# EAGLE board RCShield-v4 (EAGLE 6.3)
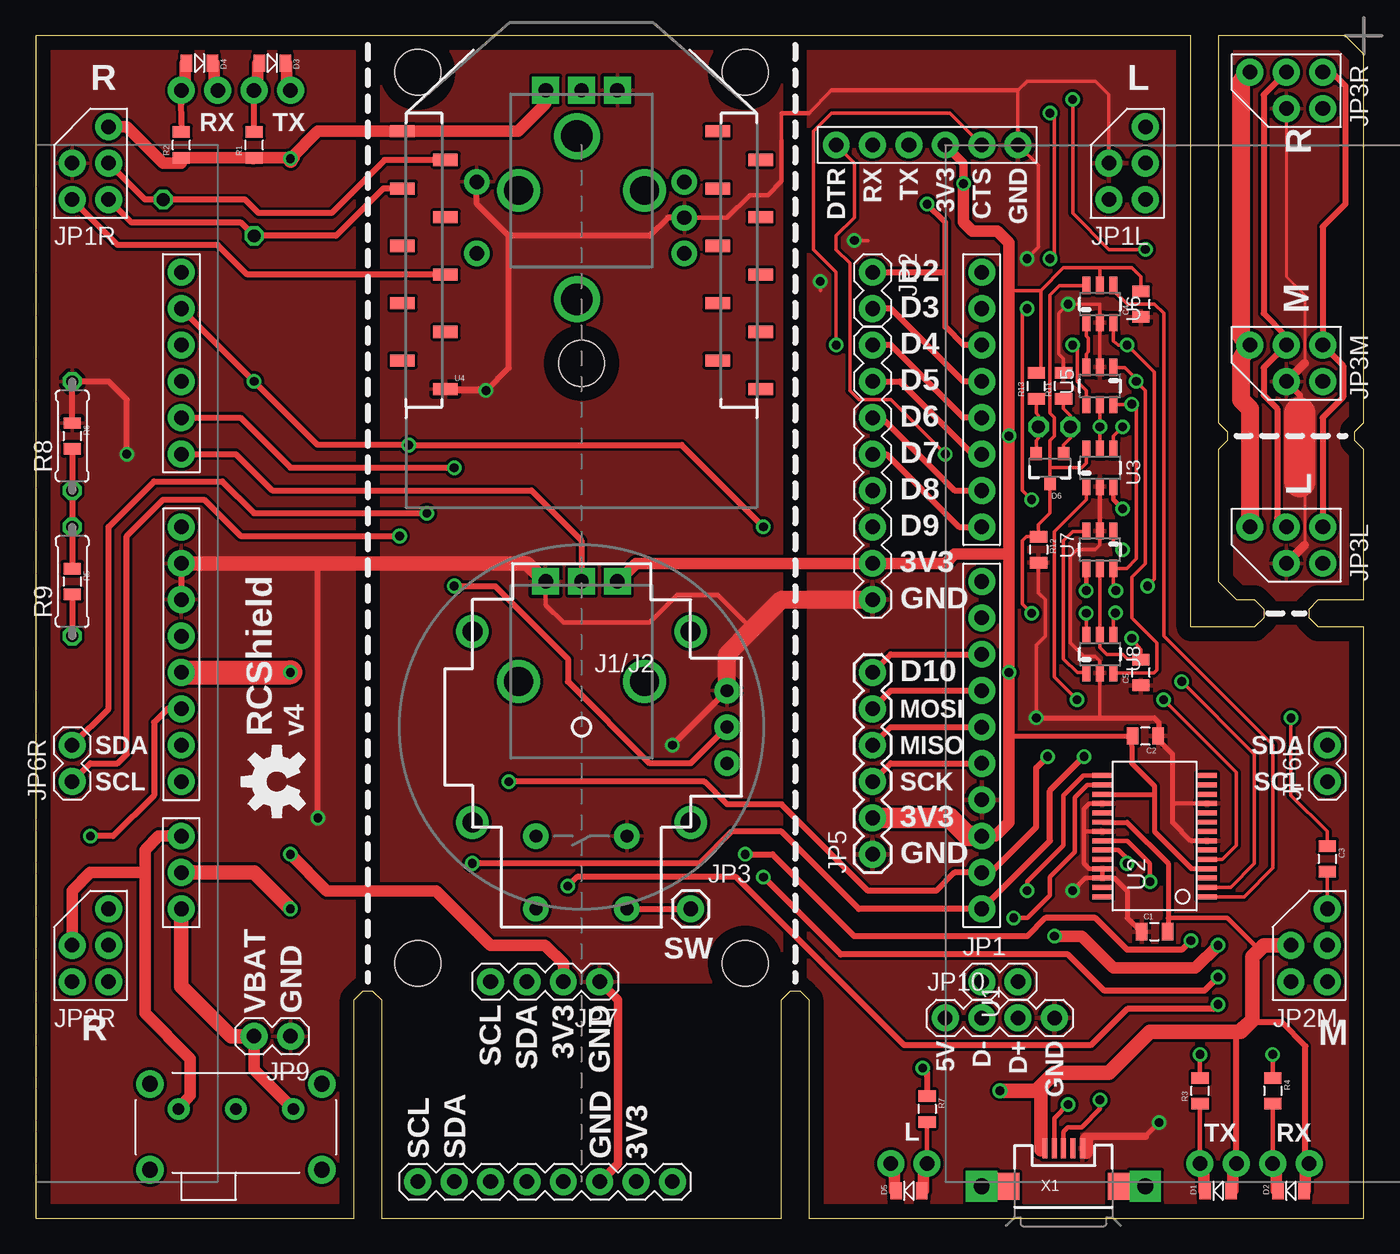
[diagram p0: board, top side]
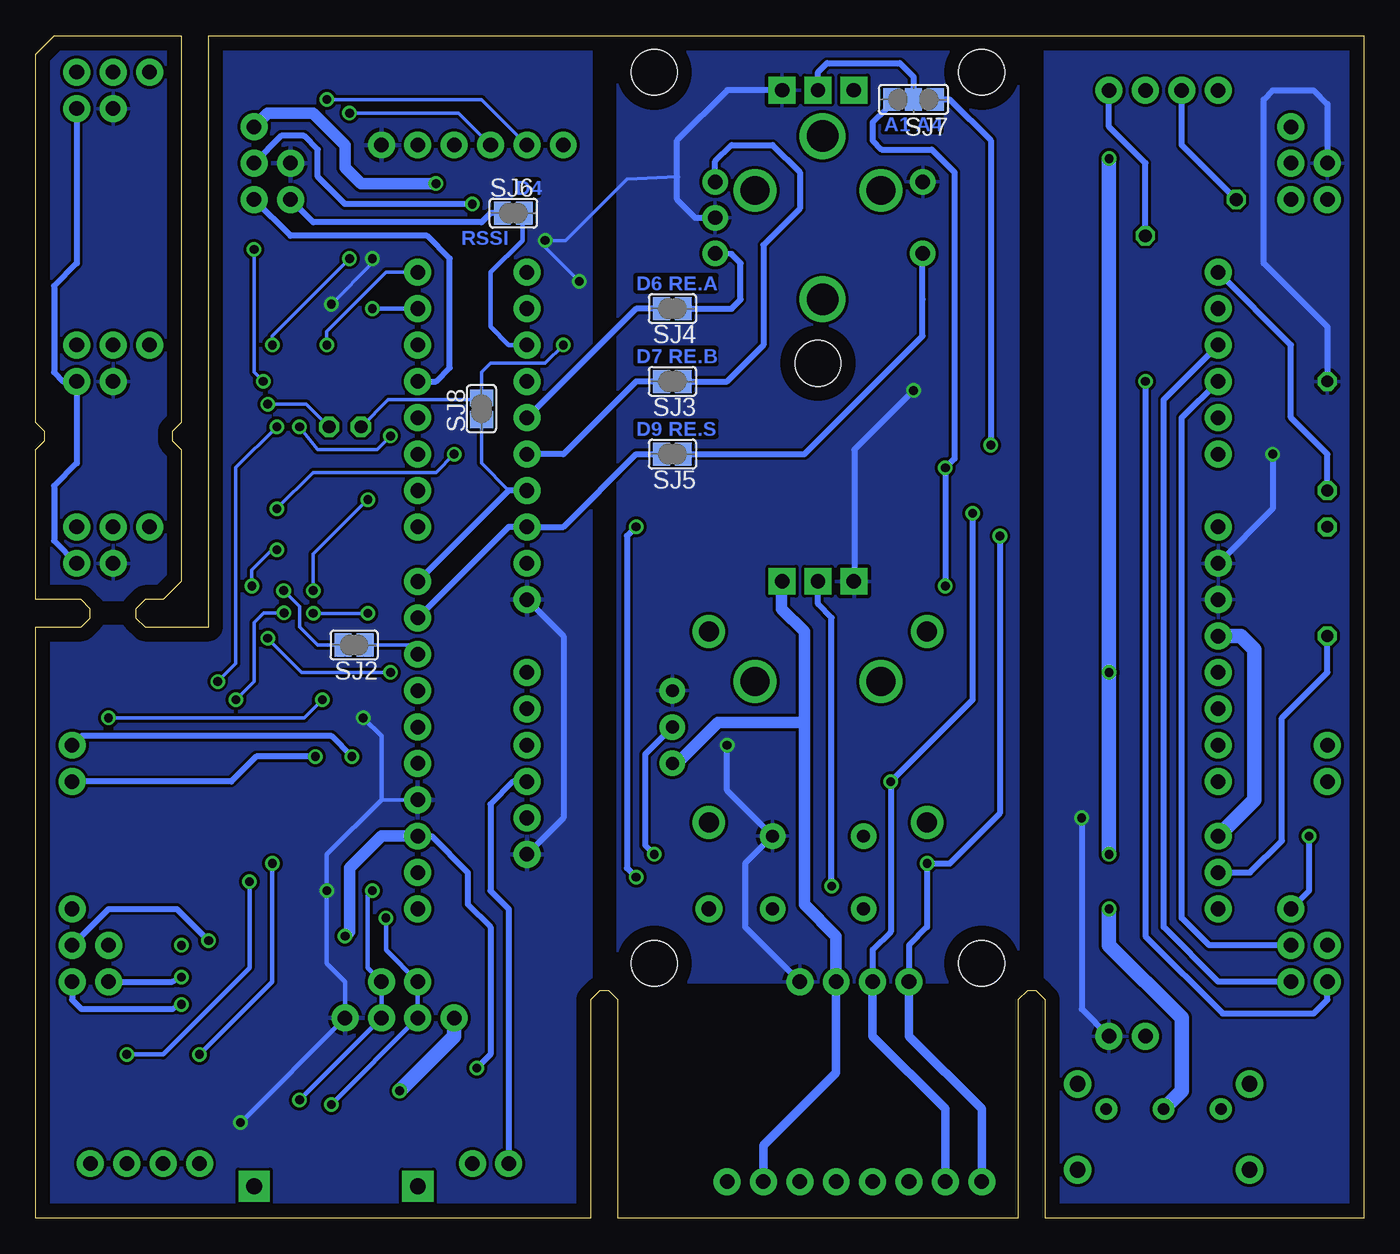
[diagram p1: board, bottom side, seen from below]

Size 92.71 x 82.55 mm. Coordinates in mm from the lower left corner, seen from the top.
Outline: 0,0 22.23,0 22.23,15.24 22.86,15.88 23.5,15.88 24.13,15.24 24.13,0 52.07,0 52.07,15.24 52.7,15.88 53.34,15.88 53.98,15.24 53.98,0 92.71,0 92.71,41.27 89.53,41.27 88.9,41.91 88.9,42.55 89.53,43.18 92.71,43.18 92.71,53.66 92.08,54.29 92.08,54.93 92.71,55.56 92.71,81.28 91.44,82.55 82.55,82.55 82.55,55.56 83.19,54.93 83.19,54.29 82.55,53.66 82.55,44.45 83.82,43.18 85.09,43.18 85.72,42.55 85.72,41.91 85.09,41.27 80.64,41.27 80.64,82.55 0,82.55 0,0
Copper layers (1*16): Top 0.035mm / dielectric 1.5mm / Bottom 0.035mm
Design rules "default *": minimum track width 10mil, minimum drill 24mil, track to track 8mil, track to pad 8mil, pad to pad 8mil, via to via 8mil, smd to smd 8mil, copper to edge 40mil, drill to drill 8mil, minimum pad ring 10mil, minimum via ring 8mil, stop-mask expansion 4mil, vias tented up to drill 0mil, thermal gap 10mil
Net classes: 0 default: width 0.203 mm; 1 vcc: width 0.254 mm
Holes 3.2 mm at 49.53,17.78 26.67,17.78 26.67,80.01 49.53,80.01 38.1,59.69

## Footprints (pad centres in the part's own frame; a part is rotated, then mirrored left to right if it is on the bottom)
0805 = smd 0.8 x 1.2: 1 -0.9,0; 2 0.9,0
LED = smd 0.8 x 1.2: A -0.9,0; C 0.9,0 | drill 1.016 pad 1.88: A1 -1.27,-1.905; C1 1.27,-1.905
SOT23-3 = smd 0.8 x 0.9: 1 -0.95,-1; 2 0.95,-1; 3 0,1.1
JOYSTICK = drill 0.9 pad 1.778: B1A -3.175,12.7; B1B 3.175,12.7; B2A -3.175,7.62; B2B 3.175,7.62 | drill 0.889 pad 1.778: H1 -2.54,-10.16; H2 0,-10.16; H3 2.54,-10.16; V1 -10.16,2.54; V2 -10.16,0; V3 -10.16,-2.54 | drill 1.397 pad 2.286: MOUNT1 -7.62,6.668; MOUNT2 -7.62,-6.668; MOUNT3 7.62,-6.668; MOUNT4 7.62,6.668
1X02 = drill 1.016 pad 1.88: 1 0,0; 2 2.54,0
2+3 = drill 1.016 pad 1.88: 1 -1.27,0; 2 1.27,0; 3 1.27,2.54; 4 -1.27,2.54; 5 -3.81,2.54
1X01 = drill 1.016 pad 1.88: 1 0,0
1X08 = drill 1.016 pad 1.88: 1 0,0; 2 2.54,0; 3 5.08,0; 4 7.62,0; 5 10.16,0; 6 12.7,0; 7 15.24,0; 8 17.78,0
1X06 = drill 1.016 pad 1.88: 1 0,0; 2 2.54,0; 3 5.08,0; 4 7.62,0; 5 10.16,0; 6 12.7,0
1X04 = drill 1.016 pad 1.88: 1 0,0; 2 2.54,0; 3 5.08,0; 4 7.62,0
1X06_F = drill 1.016 pad 1.88: 1 0,0; 2 2.54,0; 3 5.08,0; 4 7.62,0; 5 10.16,0; 6 12.7,0
1X01_S = drill 0.9 octagon: 1 0,0
ALPS_POT = drill 1 pad 1.88 square: P$1 7,-2.5; P$2 7,0; P$3 7,2.5 | drill 2: P$4 0,-4.4; P$5 0,4.4
0207/7 = drill 0.813 octagon: 1 -3.81,0; 2 3.81,0
PEC11 = drill 1 pad 1.778: A -2.5,-7.5; B 2.5,-7.5; C 0,-7.5; S1 -2.5,7; S2 2.5,7 | drill 2.2: SH1 -5.7,0; SH2 5.7,0
EG1224 = drill 0.8 pad 1.524: 1 -4,0; 2 0,0; 3 4,0 | drill 1.1 pad 1.93: P$4 6,1.75; P$5 -6,1.75; P$6 -6,-4.25; P$7 6,-4.25
SJ_C = smd 1.168 x 1.6: 1 -0.762,0; 2 0.762,0
SJ = smd 1.168 x 1.6: 1 -0.762,0; 2 0.762,0
SJ_2WAYS_1-2 = smd 1.168 x 1.6: 1 -1.524,0; 2 0,0; 3 1.524,0
TOUSCRUINO_SHIELD_SPLIT = drill 1.016 pad 1.88: 3.3V -27.94,-8.89; 5V@0 -27.94,-6.35; 5V@1 -27.94,-20.32; A0 -27.94,6.35; A1 -27.94,8.89; A2 -27.94,11.43; A3 -27.94,13.97; A4 -27.94,16.51; A5 -27.94,19.05; AREF 27.94,-20.32; BAT -27.94,-25.4; D2 27.94,13.97; D3 27.94,11.43; D4 27.94,8.89; D5 27.94,6.35; D6 27.94,3.81; D7 27.94,1.27; D8 27.94,-2.54; D9 27.94,-5.08; D10 27.94,-7.62; D11 27.94,-10.16; D12 27.94,-12.7; D13 27.94,-15.24; GND@0 -27.94,-3.81; GND@1 -27.94,-1.27; GND@2 27.94,-17.78; IOREF -27.94,-13.97; NC -27.94,-16.51; RES -27.94,-11.43; RX 27.94,19.05; SCL 27.94,-25.4; SDA 27.94,-22.86; TX 27.94,16.51; V+ -27.94,-22.86; VIN -27.94,1.27
SSOP28DB = smd 0.348 x 1.397: 1 -4.225,-3.656; 2 -3.575,-3.656; 3 -2.925,-3.656; 4 -2.275,-3.656; 5 -1.625,-3.656; 6 -0.975,-3.656; 7 -0.325,-3.656; 8 0.325,-3.656; 9 0.975,-3.656; 10 1.625,-3.656; 11 2.275,-3.656; 12 2.925,-3.656; 13 3.575,-3.656; 14 4.225,-3.656; 15 4.225,3.656; 16 3.575,3.656; 17 2.925,3.656; 18 2.275,3.656; 19 1.625,3.656; 20 0.975,3.656; 21 0.325,3.656; 22 -0.325,3.656; 23 -0.975,3.656; 24 -1.625,3.656; 25 -2.275,3.656; 26 -2.925,3.656; 27 -3.575,3.656; 28 -4.225,3.656
SOT23-6 = smd 0.55 x 1.2: 1 -0.95,-1.3; 2 0,-1.3; 3 0.95,-1.3; 4 0.95,1.3; 5 0,1.3; 6 -0.95,1.3
XBEE-SMD = smd 1.7 x 0.85: 1 -12.5,20; 2 -9.5,18; 3 -12.5,16; 4 -9.5,14; 5 -12.5,12; 6 -9.5,10; 7 -12.5,8; 8 -9.5,6; 9 -12.5,4; 10 -9.5,2; 11 12.5,2; 12 9.5,4; 13 12.5,6; 14 9.5,8; 15 12.5,10; 16 9.5,12; 17 12.5,14; 18 9.5,16; 19 12.5,18; 20 9.5,20
USB-MICROB = smd 0.35 x 1.4: D+ 0,2.65; D- -0.65,2.65; GND 1.3,2.65; ID 0.65,2.65; VBUS -1.3,2.65 | smd 1.8 x 1.9: MT1 -4,0; MT2 4,0 | drill 1.1 pad 2.184 square: MT1A -5.715,0; MT2A 5.715,0

## Placement (x,y rotation side)
C1  0.1uF  [0805]  78.11,20 0 top
C2  0.1uF  [0805]  77.47,33.66 180 top
C3  0.1uF  [0805]  90.17,25.08 270 top
C4  0.1uF  [0805]  77.15,63.82 90 top
C5  0.1uF  [0805]  77.15,38.1 90 top
D1  Green  [LED]  82.55,1.91 180 top
D2  Red  [LED]  87.63,1.91 180 top
D3  Red  [LED]  16.51,80.64 0 top
D4  Green  [LED]  11.43,80.64 0 top
D5  Red  [LED]  60.96,1.91 180 top
D6  BAT54C  [SOT23-3]  70.8,52.39 180 top
J1/J2  JOYSTICKPTH  [JOYSTICK]  38.1,34.29 180 top
JP1  USB  [1X02]  66.04,16.51 0 top
JP1L  [2+3]  74.93,72.39 270 top
JP1R  [2+3]  2.54,72.39 270 top
JP2  UART1  [1X02]  58.42,66.04 270 top
JP2M  [2+3]  87.63,17.78 270 top
JP2R  [2+3]  2.54,17.78 270 top
JP3  [1X01]  45.72,21.59 0 top
JP3L  [2+3]  88.58,45.72 0 top
JP3M  [2+3]  88.58,58.42 0 top
JP3R  [2+3]  88.58,77.47 0 top
JP4  I2C  [1X08]  44.45,2.54 180 top
JP5  SPI  [1X06]  58.42,25.4 90 top
JP6  [1X08]  58.42,43.18 90 top
JP6L  M02  [1X02]  90.17,30.48 90 top
JP6R  M02  [1X02]  2.54,30.48 90 top
JP7  I2C  [1X04]  39.37,16.51 180 top
JP8  [1X06_F]  55.88,74.93 0 top
JP9  BAT  [1X02]  17.78,12.7 180 top
JP10  USB  [1X04]  63.5,13.97 0 top
JP11  [1X01_S]  70.01,55.24 0 top
JP12  [1X01_S]  72.23,55.24 0 top
P1/P3  POT  [ALPS_POT]  38.1,37.47 90 top
P2/P4  POT  [ALPS_POT]  38.1,71.75 90 top
R1  1K  [0805]  15.24,74.93 90 top
R2  1K  [0805]  10.16,74.93 90 top
R3  1K  [0805]  81.28,8.89 90 top
R4  1K  [0805]  86.36,8.89 270 top
R5  10K  [0805]  2.54,44.45 270 top
R6  22K  [0805]  2.54,54.61 270 top
R7  1K  [0805]  62.23,7.62 270 top
R8  22K  [0207/7]  2.54,54.61 90 top
R9  10K  [0207/7]  2.54,44.45 90 top
R11  10K  [0805]  71.75,58.1 90 top
R12  68K  [0805]  70.01,46.67 270 top
R13  10K  [0805]  69.85,58.1 90 top
RE1  PEC11  [PEC11]  37.78,69.85 90 top
S4  EG1224  [EG1224]  13.97,7.62 0 top
SJ2  SJ_C  [SJ_C]  70.48,40.01 180 bottom
SJ3  [SJ]  48.26,58.42 180 bottom
SJ4  [SJ]  48.26,63.5 180 bottom
SJ5  [SJ]  48.26,53.34 180 bottom
SJ6  [SJ]  59.37,70.17 0 bottom
SJ7  [SJ_2WAYS_1-2]  31.43,78.11 180 bottom
SJ8  SJ_C  [SJ_C]  61.59,56.52 90 bottom
U1  TOUSCRUINO_SHIELD  [TOUSCRUINO_SHIELD_SPLIT]  38.1,46.99 0 top
U2  FT232RL-BASICSSOP  [SSOP28DB]  78.11,26.67 90 top
U3  TS5A3157DBV  [SOT23-6]  74.3,52.39 0 top
U4  XBEE  [XBEE-SMD]  38.1,55.88 0 top
U5  TS5A3157DBV  [SOT23-6]  74.3,58.1 180 top
U6  TS5A3157DBV  [SOT23-6]  74.3,63.82 0 top
U7  TS5A3157DBV  [SOT23-6]  74.3,46.67 180 top
U8  TS5A3157DBV  [SOT23-6]  74.3,39.37 0 top
U$1  OSHW-LOGOM  [OSHW-LOGO-M]  16.83,30.48 90 top
X1  USB  [USB-MICROB]  71.75,2.22 0 top

## Library data of the parts
C1-C5 J1/J2 JP3 JP5 R1-R7 R11-R13 U$1 = SparkFun
D1-D6 JP1 JP1L JP1R JP2 JP2M JP2R JP3L JP3M JP3R JP4 JP6 JP6L JP6R JP7-JP12 P1/P3 P2/P4 RE1 S4 SJ2 SJ7 SJ8 U1-U8 X1 = wibauxl
R8 R9 = resistor
SJ3-SJ6 = jumper

## Nets
3.3V: C2.2 C4.2 C5.2 J1/J2.H1 J1/J2.V1 JP1L.5 JP1R.5 JP4.2 JP5.2 JP6.2 JP7.2 JP8.4 P1/P3.P$1 P2/P4.P$3 R1.1 R2.1 R7.1 R13.2 U1.3.3V U1.AREF U2.4 U2.17 U3.5 U4.1 U5.5 U6.5 U7.5 U8.5
_GND [vcc]: JP3L.1 JP3M.1 JP3R.1
_RSSI: JP1L.2 SJ6.1
_V+: JP3L.5 JP3M.5 JP3R.5
_VUSB: JP2R.1 S4.1 U1.5V@0 U1.5V@1
A0: J1/J2.H2 JP2M.3 P1/P3.P$2 U1.A0
A1: J1/J2.V2 JP2M.4 SJ7.3 U1.A1
A2: JP2R.4 U1.A2
A3: JP2R.3 U1.A3
A4: JP2M.2 JP2R.2 SJ7.1 U1.A4
A5: R5.1 R6.2 R8.1 R9.2 U1.A5
D4: JP6.8 SJ6.2 U1.D4
D5: JP6.7 U1.D5
D6: JP6.6 SJ4.2 U1.D6
D7: JP6.5 SJ3.2 U1.D7
D8: JP6.4 SJ8.1 U1.D8
D9: JP6.3 SJ5.2 U1.D9
D10: JP5.6 SJ2.1 U1.D10
D+: JP1.2 JP10.3 U2.15 X1.D+
D-: JP1.1 JP10.2 U2.16 X1.D-
DTR: C3.1 U3.1
GND [vcc]: C1.1 C2.1 C4.1 C5.1 J1/J2.B2A J1/J2.H3 J1/J2.V3 JP1L.1 JP1R.1 JP4.3 JP5.1 JP6.1 JP7.1 JP8.6 JP9.1 JP10.4 P1/P3.P$3 P2/P4.P$1 R6.1 R8.2 R11.2 R12.2 RE1.C RE1.S2 U1.GND@0 U1.GND@1 U1.GND@2 U2.7 U2.11 U2.18 U2.21 U2.25 U2.26 U3.2 U4.10 U5.2 U6.2 U7.2 U8.2 X1.GND
J1.S: J1/J2.B1A JP3.1
MISO: JP5.4 U1.D12
MOSI: JP5.5 U1.D11
N$1: C3.2 JP2M.5
N$4: JP3L.4 JP3M.4 JP3R.4
N$5: JP3L.3 JP3M.3 JP3R.3
N$6: JP3L.2 JP3M.2 JP3R.2
N$7: P2/P4.P$2 SJ7.2
N$8: D5.A1 R7.2
N$12: U7.3 U8.1
N$13: U5.3 U6.1
N$14: D3.A1 R1.2
N$18: R3.2 U2.23
N$22: R4.1 U2.22
N$25: D4.A1 R2.2
R_CTS: D6.2 JP8.5 JP11.1 R13.1 SJ8.2
R_CTS__OR__RX_LX: D6.3 R12.1 U3.6 U6.6 U8.6
R_DTR: JP8.1 U3.3
R_RX: JP8.3 U6.3 U7.1
R_TX: JP8.2 U5.1 U8.3
RE.A: RE1.A SJ4.1
RE.B: RE1.B SJ3.1
RE.S: RE1.S1 SJ5.1
RES: JP2R.5 U1.RES
RSSI: JP1R.2 U4.6
RX: U1.RX U5.4
RX1: JP1L.4 JP2.1 U1.D2
RX_LX: D6.1 JP12.1 R11.1 SJ2.2 U5.6 U7.6
SCK: D5.C1 JP5.3 U1.D13
SCL: JP4.8 JP6L.1 JP6R.1 JP7.4 U1.SCL
SDA: JP4.7 JP6L.2 JP6R.2 JP7.3 U1.SDA
TX: U1.TX U7.4
TX1: JP1L.3 JP2.2 U1.D3
U_DTR: U2.2 U3.4
U_RX: U2.5 U8.4
U_RX_LED: D2.C1 R4.2
U_TX: U2.1 U6.4
U_TX_LED: D1.C1 R3.1
V+: R5.2 R9.1 S4.2 U1.V+
VBAT: JP9.2 S4.3 U1.BAT
VUSB: C1.2 D1.A1 D2.A1 JP2M.1 JP10.1 U2.20 X1.VBUS
X_RX: D3.C1 JP1R.3 U4.3
X_TX: D4.C1 JP1R.4 U4.2

## Tracks (layer width: path | path; a pad name or v marks a point on that pad's centre or on a via)
3.3V  (via drill 0.61)
  Top 0.254: U3.5 v74.3,55.24 U5.5 | R13.2 69.85,58.74 70.17,59.05 70.17,64.77 | 74.3,66.36 71.75,66.36 70.17,64.77 | 74.3,66.36 U6.5 | 70.17,64.77 67.94,64.77 | U7.5 U8.5 74.3,39.85 74.77,39.37 75.88,39.37 76.2,39.05 76.78,39.05 C5.2 77.15,39.69 v76.52,40.48 | C4.2 77.15,65.72 76.52,66.36 74.3,66.36
  Top 0.305: 68,59.95 67.94,60.33
  Top 0.356: U2.4 80.7,24.39 78.11,26.99 78.11,29.53 | 67.94,33.66 C2.2 76.52,32.97 76.52,31.75 78.11,30.16 78.11,29.53 | U2.17 78.04,29.59 78.11,29.53
  Top 0.406: v61.91,10.48 62.23,10.16 R7.1 62.23,9.84
  Top 0.61: v64.77,72.23 64.77,73.66 JP8.4
  Top 0.813: U1.AREF 66.99,26.67 67.94,27.62 67.94,33.66 v67.94,38.1 67.94,46.35 | 67.94,46.35 64.14,46.35 63.5,45.72 JP6.2 41.91,45.72 J1/J2.H1 40.62,44.47 P1/P3.P$1 | 15.19,73.98 R1.1 | R1.1 18.05,74.03 v17.78,73.98 19.68,75.88 U4.1 33.34,75.88 33.66,75.88 35.58,77.8 P2/P4.P$3 | v17.78,25.4 20.32,22.86 27.94,22.86 31.75,19.05 35.56,19.05 36.83,17.78 JP7.2 | v82.55,19.05 80.96,17.46 75.25,17.46 73.03,19.68 v71.12,19.68 | v64.77,72.23 64.77,69.53 65.41,68.9 67.15,68.9 67.94,68.1 67.94,64.77 67.94,60.33 v67.94,54.61 67.94,46.35 | 10.16,73.66 R2.1 | R2.1 10.11,73.66 8.89,73.66 6.35,76.2 JP1R.5 | R2.1 R1.1
  Top 1.016: 17.78,73.82 v17.78,73.98
  Top 1.422: JP5.2 63.82,27.94 65.09,26.67 U1.AREF
  Top 1.676: U1.3.3V v17.78,38.1
  Bottom 0.254: v74.3,55.24 73.03,53.66 68.9,53.66 v67.94,54.61 | v76.52,40.48 74.14,38.1 v67.94,38.1
  Bottom 0.406: U1.AREF 65.09,26.67 62.55,24.13 62.55,21.91 60.96,20.32 60.96,11.43 v61.91,10.48
  Bottom 0.508: J1/J2.H1 40.62,44.45
  Bottom 0.61: JP7.2 36.83,10.16 41.91,5.08 JP4.2
  Bottom 0.813: v71.12,19.68 70.8,20 70.8,24.45 68.58,26.67 U1.AREF | 39.05,34.61 39.05,40.96 40.64,42.55 J1/J2.H1 40.96,44.51 | 39.05,34.61 39.05,21.91 36.83,19.68 JP7.2 | J1/J2.V1 47.94,31.75 45.09,34.61 39.05,34.61 | v64.77,72.23 70.01,72.23 71.12,73.34 71.12,74.93 73.34,77.15 76.52,77.15 JP1L.5
  Bottom 1.016: v17.78,73.98 v17.78,38.1 v17.78,25.4
_GND
  Top 0.203: JP3R.1 87.31,65.72 88.58,64.45 88.58,59.69 | 88.58,51.12 88.58,46.99
  Top 0.305: 88.27,51.44 88.58,51.12
  Top 0.406: JP3M.1 88.27,57.47 88.27,56.2
  Top 0.61: 88.58,59.69 JP3M.1 | 88.58,46.99 JP3L.1
  Top 2.184: 88.27,56.2 88.27,51.44
  pour Bottom: 82.55,82.55 93.98,82.55 93.98,43.18 82.55,43.18
  pour Top: 82.55,82.55 96.52,82.55 96.52,43.18 82.55,43.18
_RSSI
  Bottom 0.406: SJ6.1 60.96,70.17 61.59,69.53 73.34,69.53 JP1L.2
_V+
  Top 1.27: JP3R.5 84.14,79.38 84.14,61.59 JP3M.5 84.14,60.01 84.14,57.15 84.77,56.52 JP3L.5
_VUSB
  Top 0.813: S4.1 10.79,8.57 10.79,11.11 7.62,14.29 7.62,24.13 | 7.62,24.13 7.62,25.72 8.57,26.67 U1.5V@1 | JP2R.1 2.54,22.86 3.81,24.13 7.62,24.13
  Bottom 1.016: U1.5V@0 8.57,40.64 7.62,39.69 7.62,29.21 U1.5V@1
A0  (via drill 0.61)
  Top 0.406: v82.55,14.92 82.23,14.61 76.2,14.61 73.66,12.06 60.64,12.06 48.9,23.81 37.78,23.81 v37.15,23.18 | U1.A0 13.97,53.34 16.51,50.8 34.61,50.8 38.1,47.31 J1/J2.H2 P1/P3.P$2
  Bottom 0.406: JP2M.3 90.17,15.24 89.53,14.61 83.19,14.61 v82.55,14.92 | v37.15,23.18 37.15,41.91 38.1,42.86 J1/J2.H2 P1/P3.P$2
A1  (via drill 0.61)
  Top 0.406: v80.64,19.37 80.01,18.73 76.2,18.73 73.98,20.95 70.48,20.95 69.22,19.68 57.15,19.68 51.44,25.4 v49.53,25.4 | J1/J2.V2 45.72,31.75 42.86,31.75 37.15,37.47 37.15,39.05 32.07,44.13 v29.21,44.13 | U1.A1 14.29,55.88 17.78,52.39 v29.21,52.39
  Bottom 0.406: JP2M.4 87.63,21.59 82.87,21.59 v80.64,19.37 | J1/J2.V2 50.16,32.38 50.16,26.04 v49.53,25.4 | v29.21,44.13 v29.21,52.39 28.57,53.02 28.57,73.03 30.16,74.61 33.66,74.61 34.29,75.25 34.29,76.52 33.34,77.47 SJ7.3
A2
  Bottom 0.406: JP2R.4 10.79,19.05 12.7,20.95 12.7,55.88 U1.A2
A3
  Bottom 0.406: JP2R.3 10.16,16.51 13.97,20.32 13.97,57.15 U1.A3
A4  (via drill 0.61)
  Top 0.406: v82.55,16.83 81.6,15.88 74.61,15.88 72.07,18.41 56.2,18.41 v50.8,23.81 | U1.A4 v15.24,58.42 19.68,53.98 v26.04,53.98 45.09,53.98 v50.8,48.26
  Bottom 0.406: v50.8,48.26 51.44,47.62 51.44,24.45 v50.8,23.81 | v15.24,58.42 15.24,19.68 9.84,14.29 3.49,14.29 2.54,15.24 JP2R.2 | v26.04,53.98 26.04,75.25 28.89,78.11 SJ7.1 | JP2M.2 83.19,16.51 v82.55,16.83
A5
  Top 0.406: R6.2 R8.1 R9.2 R5.1
  Bottom 0.406: R8.1 2.54,53.34 5.08,55.88 5.08,60.96 U1.A5
D4
  Top 0.406: U1.D4 64.77,55.88 59.69,60.96 JP6.8
  Bottom 0.305: JP6.8 59.69,60.96 60.96,62.23 60.96,66.04 58.74,68.26 58.74,69.85 SJ6.2
D5
  Top 0.406: JP6.7 60.33,58.42 65.41,53.34 U1.D5
D6
  Top 0.406: JP6.6 59.05,55.88 64.14,50.8 U1.D6
  Bottom 0.406: SJ4.2 50.8,63.5 JP6.6
D7
  Top 0.406: JP6.5 59.37,53.34 64.45,48.26 U1.D7
  Bottom 0.406: SJ3.2 50.8,58.42 55.88,53.34 JP6.5
D8
  Bottom 0.254: 59.69,50.8 61.59,52.7 SJ8.1
  Bottom 0.406: JP6.4 59.69,50.8 U1.D8
D9
  Bottom 0.406: U1.D9 59.69,48.26 JP6.3 55.88,48.26 50.8,53.34 SJ5.2
D10
  Top 0.406: JP5.6 59.69,39.37 U1.D10
  Bottom 0.254: SJ2.1 66.67,40.01 U1.D10
D+  (via drill 0.61)
  Top 0.305: X1.D+ 71.75,6.03 72.07,6.35 73.03,6.35 74.3,7.62 v74.3,8.26 | U2.15 73.12,30.89 71.75,29.53 71.75,26.04 69.22,23.5 v69.22,22.86
  Bottom 0.305: v74.3,8.26 JP10.3 JP1.2 69.53,17.46 69.53,22.54 v69.22,22.86
D-  (via drill 0.61)
  Top 0.305: U2.16 73.42,30.25 72.55,29.37 72.55,25.56 70.8,23.81 70.8,22.54 69.22,20.95 v68.26,20.95 | X1.D- 71.11,6.97 v72.07,7.94
  Bottom 0.305: v68.26,20.95 68.26,18.73 JP1.1 JP10.2 v72.07,7.94
DTR  (via drill 0.61)
  Top 0.254: v72.71,36.2 71.12,37.78 71.12,47.94 73.34,50.17 U3.1 | C3.1 90.17,26.99 87.63,29.53 v87.63,34.92
  Bottom 0.254: v72.71,36.2 73.98,34.92 v87.63,34.92
GND  (via drill 0.61)
  Top 0.254: U5.2 U6.2 74.3,63.82 v72.07,63.82 71.44,63.18 71.44,60.33 71.75,60.01 R11.2 | v69.22,66.99 70.01,67.79 70.01,73.5 JP8.6 68.58,78.74 69.22,79.38 73.98,79.38 74.93,78.42 JP1L.1 | 74.3,47.62 74.3,46.99 73.98,46.67 72.71,46.67 72.23,46.2 72.23,40.16 73.18,39.21 73.98,39.21 74.3,38.89 U8.2 74.3,34.92 | R12.2 70.01,43.66 70.48,43.18 70.48,40.64 69.85,40.01 v69.85,34.92 | 52.07,77.15 52.07,75.25 | 55.56,78.74 53.98,77.15 | v54.77,65.41 54.77,64.77 | v57.15,68.26 58.1,68.26
  Top 0.305: U2.18 73.55,28.95 73.18,28.57 73.18,26.99 | 73.18,26.99 73.49,26.99 U2.21 73.67,27 73.18,26.99 | 73.18,26.99 73.18,24.77 73.55,24.39 U2.25 U2.26 73.28,23.75 v72.39,22.86 | X1.GND 73.06,4.42 73.34,4.6 | 73.34,5.51 73.36,5.73 | 77.47,5.71 v78.42,6.67 | U2.11 79.38,28.95 79.38,28.89 | U3.2 U7.2 74.3,47.62 | 68.58,78.74 55.56,78.74 | 53.98,77.15 52.07,77.15 | 52.07,75.25 52.07,72.39 51.12,71.44 49.85,71.44 48.26,69.85 RE1.C | P1/P3.P$3 35.6,42.82 36.83,41.59 42.86,41.59 44.77,43.5 47.62,43.5 50.01,41.12
  Top 0.356: v69.85,34.92 74.3,34.92 78.11,34.92 78.42,34.61 78.42,34.02 | 78.42,34.02 C2.1 78.42,33.6 78.11,33.66 | U2.26 75.31,23.75 76.2,22.86 76.2,20.95 76.83,20.32 C1.1 | U2.7 80.65,26.34 79.38,27.62 79.38,28.89 79.38,32.38 78.11,33.66 | 78.42,34.02 78.11,33.66
  Top 0.406: v31.43,57.78 28.7,57.78 U4.10 31.34,57.88 v31.43,57.78 | R6.1 R8.2 5.08,58.42 6.35,57.15 v6.35,53.34 | U1.GND@1 U1.GND@0 | J1/J2.V3 v44.45,33.02 | RE1.C 44.13,69.85 42.86,68.58 33.02,68.58 | 33.02,68.58 30.78,70.82 RE1.S2 | v19.68,27.94 19.68,45.4 19.37,45.72 | v31.43,57.78 33.02,59.37 33.02,68.58
  Top 0.533: 73.36,5.73 77.47,5.71
  Top 0.61: JP7.1 40.64,15.24 40.64,3.81 JP4.3
  Top 0.94: 73.34,4.6 73.34,5.51
  Top 1.016: J1/J2.H3 34.29,45.72 19.37,45.72 U1.GND@1
  Top 1.27: J1/J2.V3 48.26,39.37 50.01,41.12 52.07,43.18 JP6.1
  Bottom 0.254: v72.07,63.82 69.22,66.67 v69.22,66.99 | 47.94,72.71 51.44,72.55 55.72,68.26 v57.15,68.26 57.15,67.79 v54.77,65.41 | U1.GND@2 68.58,29.21
  Bottom 0.305: v69.85,34.92 68.58,33.66 68.58,29.21 72.39,25.4 v72.39,22.86 72.39,17.78 71.12,16.51 JP10.4 v78.42,6.67
  Bottom 0.406: JP5.1 55.88,27.94 55.88,40.64 JP6.1 | R8.2 2.54,62.23 6.99,66.67 6.99,78.11 6.35,78.74 3.49,78.74 2.54,77.79 JP1R.1 | v31.43,57.78 35.56,53.66 J1/J2.H3 | v44.45,33.02 44.45,29.84 J1/J2.B2A 43.18,24.77 43.18,20.32 JP7.1 | v6.35,53.34 6.35,49.53 U1.GND@1 | P2/P4.P$1 44.44,78.75 47.94,75.25 47.94,72.71 47.94,71.12 46.67,69.85 RE1.C | v19.68,27.94 19.68,14.61 JP9.1
  pour Top: 0,84.14 22.23,84.14 22.23,0 0,0
  pour Top: 24.13,83.82 52.07,83.82 52.07,16.51 24.13,16.51
  pour Bottom: 0,86.36 22.23,86.36 22.23,0 0,0
  pour Bottom: 24.13,86.36 52.07,86.36 52.07,16.51 24.13,16.51
  pour Bottom: 53.98,86.36 81.28,86.36 81.28,41.27 92.71,41.27 92.71,0 53.98,0
  pour Top: 53.98,83.82 81.28,83.82 81.28,41.27 92.71,41.27 92.71,0 53.98,0
J1.S
  Top 0.406: J1/J2.B1A JP3.1
MISO
  Top 0.406: JP5.4 59.69,34.29 U1.D12
MOSI
  Top 0.406: JP5.5 59.69,36.83 U1.D11
N$1
  Top 0.254: C3.2 JP2M.5
N$4
  Top 0.406: JP3R.4 85.72,78.42 85.72,63.18 87.31,61.59 JP3M.4 85.72,59.37 85.72,57.47 86.68,56.52 86.68,48.9 JP3L.4
N$5
  Top 0.406: JP3R.3 90.49,80.01 91.44,79.06 91.44,70.8 89.85,69.22 JP3M.3 91.28,59.53 91.28,57.31 89.85,55.88 JP3L.3
N$6
  Bottom 0.406: JP3R.2 89.85,66.67 91.44,65.09 91.44,59.05 90.81,58.42 JP3M.2 89.85,52.7 91.44,51.12 91.44,47.31 JP3L.2
N$7
  Bottom 0.406: P2/P4.P$2 38.1,80.01 37.47,80.64 32.38,80.64 31.43,79.69 SJ7.2
N$8
  Top 0.305: D5.A1 R7.2
N$12
  Top 0.254: U8.1 73.31,38.1 72.71,38.1 71.75,39.05 71.75,47.31 72.39,47.94 73.34,47.94 73.34,47.63
  Top 0.305: U7.3 73.34,47.63
N$13
  Top 0.254: U6.1 73.34,61.59 73.5,61.44 73.5,60.48 73.34,60.33 U5.3
N$14
  Top 0.406: R1.2 D3.A1
N$18  (via drill 0.61)
  Top 0.305: U2.23 75.59,25.7 76.2,25.08 v76.2,24.77 | R3.2 v81.28,11.43
  Bottom 0.305: v76.2,24.77 76.2,16.51 v81.28,11.43
N$22  (via drill 0.61)
  Top 0.305: U2.22 76.21,26.34 77.79,24.77 v77.79,23.5 | R4.1 v86.36,11.43
  Bottom 0.305: v77.79,23.5 77.79,17.46 83.82,11.43 v86.36,11.43
N$25
  Top 0.406: R2.2 10.21,75.83 10.16,77.79 D4.A1
R_CTS  (via drill 0.61)
  Top 0.254: R13.1 69.85,56.2 70.01,56.04 JP11.1 70.01,54.45 69.85,54.29 D6.2 | JP8.5 63.82,77.15 55.56,77.15 54.29,75.88 54.29,67.63 55.88,66.04 v55.88,60.96
  Bottom 0.254: JP11.1 68.1,57.15 61.72,57.15 SJ8.2 61.59,59.05 60.96,59.69 57.15,59.69 v55.88,60.96
R_CTS__OR__RX_LX  (via drill 0.61)
  Top 0.254: U6.6 71.47,65.12 70.8,64.45 70.8,56.2 71.12,55.88 71.12,54.61 70.8,54.29 70.8,52.39 | 70.8,52.39 D6.3 70.8,49.21 70.01,48.42 R12.1 69.16,47.57 68.9,47.31 68.9,42.86 v69.53,42.23 | 73.34,53.66 73.34,52.71 73.03,52.39 70.8,52.39 | U8.6 v73.34,42.23
  Top 0.305: U3.6 73.34,53.66
  Bottom 0.254: v73.34,42.23 v69.53,42.23
R_DTR  (via drill 0.61)
  Top 0.254: v63.5,53.34 59.69,57.15 57.47,57.15 56.83,57.78 56.83,66.67 55.88,67.63 55.88,68.58 57.15,69.85 57.15,73.66 JP8.1
  Top 0.305: U3.3 75.25,50.17 v75.88,49.53
  Bottom 0.254: v75.88,49.53 73.34,52.07 64.77,52.07 v63.5,53.34
R_RX  (via drill 0.61)
  Top 0.254: v77.63,44.13 78.11,44.61 78.11,59.05 v76.2,60.96 75.56,60.96 75.22,61.25 U6.3 | v75.88,46.67 75.72,46.67 75.25,47.15 75.25,48.29 | v70.8,66.99 71.12,67.31 71.12,76.83 v70.8,77.15
  Top 0.305: 75.25,48.29 U7.1
  Bottom 0.254: v77.63,44.13 77.63,45.24 76.2,46.67 v75.88,46.67 | v76.2,60.96 76.2,61.59 v70.8,66.99 | v70.8,77.15 63.18,77.15 JP8.3
R_TX  (via drill 0.61)
  Top 0.254: 75.28,59.4 U5.1 75.28,59.37 76.04,59.37 76.83,58.58 v76.83,58.42 77.47,57.78 77.47,45.72 76.52,44.77 76.52,41.91 78.26,40.16 78.26,38.26 78.08,38.07 U8.3 | v77.47,67.63 74.93,67.63 72.39,70.17 v72.39,78.11
  Bottom 0.254: v76.83,58.42 77.47,59.05 v77.47,67.63 | v72.39,78.11 61.59,78.11 JP8.2
RE.A
  Bottom 0.406: SJ4.1 44.13,63.5 43.5,64.14 43.5,66.67 44.13,67.31 RE1.A
RE.B
  Bottom 0.406: SJ3.1 44.45,58.42 41.91,60.96 41.91,67.94 39.37,70.48 39.37,73.03 41.27,74.93 44.13,74.93 45.28,73.78 RE1.B
RE.S
  Bottom 0.406: SJ5.1 39.05,53.34 30.8,61.59 30.8,64.16 30.8,67.31 RE1.S1
RES  (via drill 0.61)
  Top 0.406: U1.RES 9.21,35.56 8.26,34.61 8.26,29.53 5.4,26.67 v3.81,26.67
  Bottom 0.406: JP2R.5 3.81,22.86 v3.81,26.67
RSSI
  Top 0.406: U4.6 14.77,65.88 12.7,67.94 5.71,67.94 JP1R.2
RX  (via drill 0.61)
  Top 0.254: v72.39,60.96 72.71,60.64 72.71,58.42 73.34,57.78 U5.4
  Bottom 0.254: v72.39,60.96 72.39,61.91 68.26,66.04 U1.RX
RX1  (via drill 0.61)
  Top 0.406: U1.D2 64.77,60.96 63.5,62.23 63.5,66.04 | 63.5,66.04 63.5,69.53 v62.23,70.8 | JP2.1 63.5,66.04
  Bottom 0.406: v62.23,70.8 71.12,70.8 73.03,72.71 73.03,74.61 73.98,75.56 75.56,75.56 JP1L.4
RX_LX  (via drill 0.61)
  Top 0.254: v75.41,43.81 75.25,43.97 75.25,45.69 | 71.75,57.47 R11.1 71.75,56.52 72.23,56.04 JP12.1 72.23,54.45 71.75,53.98 D6.1 | 75.28,56.8 76.55,56.8 | 76.55,56.8 76.83,56.52 76.83,46.04 76.17,45.37 U7.6 | 76.55,56.8 v76.52,56.83
  Top 0.305: U5.6 75.28,56.8 | 75.25,45.69 U7.6
  Bottom 0.254: v75.41,43.81 74.3,42.7 74.3,41.27 73.03,40.01 SJ2.2 | v76.52,56.83 73.82,56.83 JP12.1
SCK
  Top 0.406: JP5.3 59.69,31.75 U1.D13
  Bottom 0.406: JP5.3 59.37,30.48 60.96,28.89 60.96,22.86 59.69,21.59 D5.C1
SCL  (via drill 0.61)
  Top 0.406: v30.48,24.77 46.35,24.77 48.58,26.99 52.07,26.99 57.47,21.59 U1.SCL 70.8,26.35 70.8,29.84 v73.18,32.23 | JP6R.1 3.81,31.75 5.71,31.75 6.35,32.38 6.35,47.62 8.89,50.16 11.75,50.16 14.29,47.62 v25.4,47.62
  Bottom 0.406: JP7.4 31.75,19.05 30.48,20.32 v30.48,24.77 28.89,24.77 25.4,28.26 v25.4,47.62 | v73.18,32.23 77.31,32.23 79.06,30.48 JP6L.1
  Bottom 0.61: JP7.4 31.75,12.7 26.67,7.62 JP4.8
SDA  (via drill 0.61)
  Top 0.406: v33.02,30.48 46.67,30.48 48.26,28.89 52.07,28.89 58.1,22.86 62.87,22.86 64.14,24.13 U1.SDA 66.67,24.13 69.85,27.3 69.85,31.43 v70.64,32.23 | JP6R.2 5.08,35.56 5.08,48.26 8.26,51.44 13.02,51.44 15.24,49.21 v27.3,49.21
  Bottom 0.406: v70.64,32.23 72.07,33.66 89.53,33.66 JP6L.2 | JP7.3 34.29,18.73 33.02,20 v33.02,30.48 27.3,36.2 v27.3,49.21
  Bottom 0.61: JP7.3 34.29,12.7 29.21,7.62 JP4.7
TX  (via drill 0.61)
  Top 0.254: v69.53,50.16 68.9,50.8 68.9,63.18 v69.22,63.5
  Top 0.305: U7.4 73.34,45.41 73.34,44.13 v73.34,43.81
  Bottom 0.254: v73.34,43.81 73.34,46.35 v69.53,50.16
  Bottom 0.305: v69.22,63.5 U1.TX
TX1
  Top 0.406: U1.D3 64.77,58.42 59.69,63.5 JP2.2
  Bottom 0.406: U1.D3 64.77,58.42 63.82,59.37 63.82,66.99 65.41,68.58 74.93,68.58 JP1L.3
U_DTR  (via drill 0.61)
  Top 0.254: U2.2 83.42,23.09 85.09,24.77 85.09,32.38 v80.01,37.47 | v75.88,55.24 75.25,54.61 U3.4
  Bottom 0.254: v80.01,37.47 78.74,38.73 78.74,52.39 v75.88,55.24
U_RX  (via drill 0.61)
  Top 0.254: U2.5 82.83,25.05 83.82,26.04 83.82,31.11 v78.74,36.2 | U8.4 75.25,42.07 75.38,42.2 v75.38,42.26
  Bottom 0.254: v75.38,42.26 76.81,42.26 77.47,41.59 77.47,37.47 v78.74,36.2
U_RX_LED
  Top 0.305: R4.2 D2.C1
U_TX
  Top 0.254: U2.1 84.36,22.45 86.36,24.45 86.36,33.02 78.74,40.64 78.74,63.18 78.11,63.82 76.2,63.82 75.25,64.77 75.25,65.09 75.28,65.09 U6.4
U_TX_LED
  Top 0.305: R3.1 D1.C1
V+  (via drill 0.61)
  Top 0.406: R5.2 R9.1
  Top 1.016: U1.V+ 15.24,24.13 v17.78,21.59
  Bottom 0.406: R9.1 2.54,38.1 5.71,34.92 5.71,26.35 7.94,24.13 U1.V+
  Bottom 1.016: v17.78,21.59 17.78,19.05 12.7,13.97 12.7,8.89 S4.2
VBAT
  Top 0.813: JP9.2 15.24,10.35 S4.3
  Top 1.016: U1.BAT 10.16,16.19 13.65,12.7 JP9.2
VUSB  (via drill 0.61)
  Top 0.305: X1.VBUS 70.05,7.74 70.17,4.76 | 79.06,20.95 83.19,20.95 85.41,18.73
  Top 0.356: U2.20 76.18,27.64 79.06,24.77 79.06,20.95 79.06,19.68 C1.2
  Top 0.406: D1.A1 83.82,13.02 83.98,13.02 84.45,13.34 84.77,13.65 87,13.65 88.65,12 88.65,3.56
  Top 0.94: 70.17,4.76 70.17,9.21 71.12,10.16
  Top 1.016: 84.93,13.81 84.45,13.34 84.14,13.02 83.98,13.02 | 83.98,13.02 77.79,13.02 74.93,10.16 71.12,10.16 69.85,8.89 v67.31,8.89 | 84.93,13.81 83.98,13.02 | 84.93,13.81 84.93,18.26 85.41,18.73 85.72,19.05 JP2M.1
  Bottom 1.016: v67.31,8.89 63.5,12.7 JP10.1
X_RX  (via drill 0.9)
  Top 0.406: U4.3 24.25,71.88 20.95,68.58 v15.24,68.58 14.29,69.53 6.67,69.53 JP1R.3
  Bottom 0.406: v15.24,68.58 15.24,73.66 17.78,76.2 D3.C1
X_TX  (via drill 0.9)
  Top 0.406: U4.2 24.35,73.88 20.64,70.17 15.56,70.17 14.61,71.12 v8.89,71.12 7.62,71.12 JP1R.4
  Bottom 0.406: v8.89,71.12 12.7,74.93 D4.C1

## Text on the board
Bottom: A1 A4 | D4 | RSSI | D6 RE.A | D7 RE.B | D9 RE.S
tPlace: R | L | RX | TX | R | DTR | RX | TX | 3V3 | CTS | GND | D2 | D3 | M | D4 | D5 | D6 | D7 | D8 | L | D9 | 3V3 | GND | D10 | MOSI | RCShield | v4 | SDA | SDA | MISO | SCL | SCL | SCK | 3V3 | GND | SW | SCL | SDA | 3V3 | GND | VBAT | GND | R | 5V | D- | D+ | GND | M | L | TX | RX | SCL | SDA | GND | 3V3